# Altium PCB VF_pcb.PcbDoc
Units mil, origin at the board's own origin, x right, y up, seen from the top; angles counter-clockwise.
Board outline 1830 x 1880 mil, 2 copper layers (Top Layer, Bottom Layer); 31 components, 38 nets, 158 pads, 38 vias.
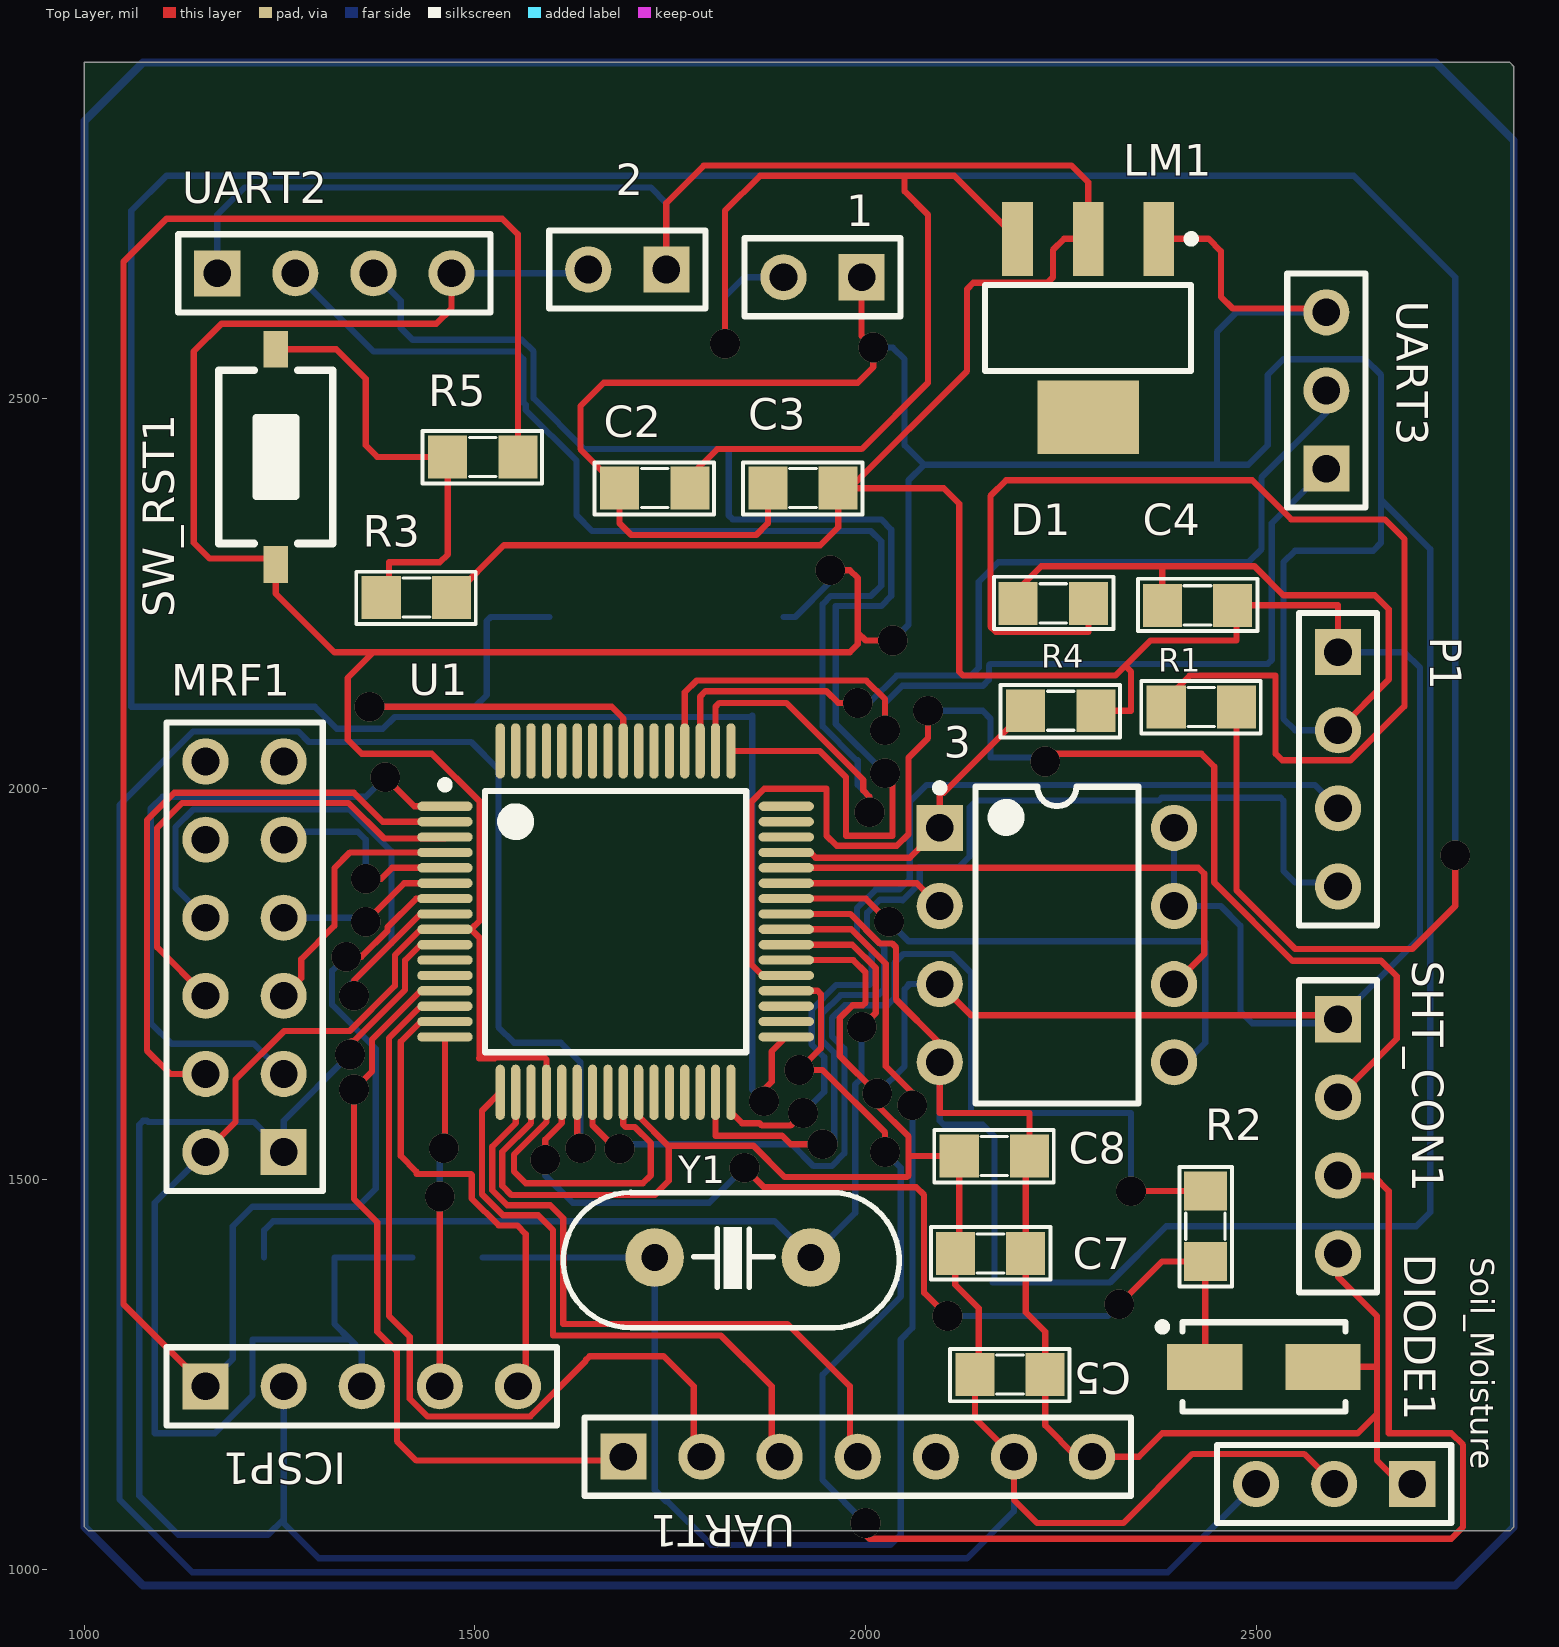
[diagram p0: Top Layer view]
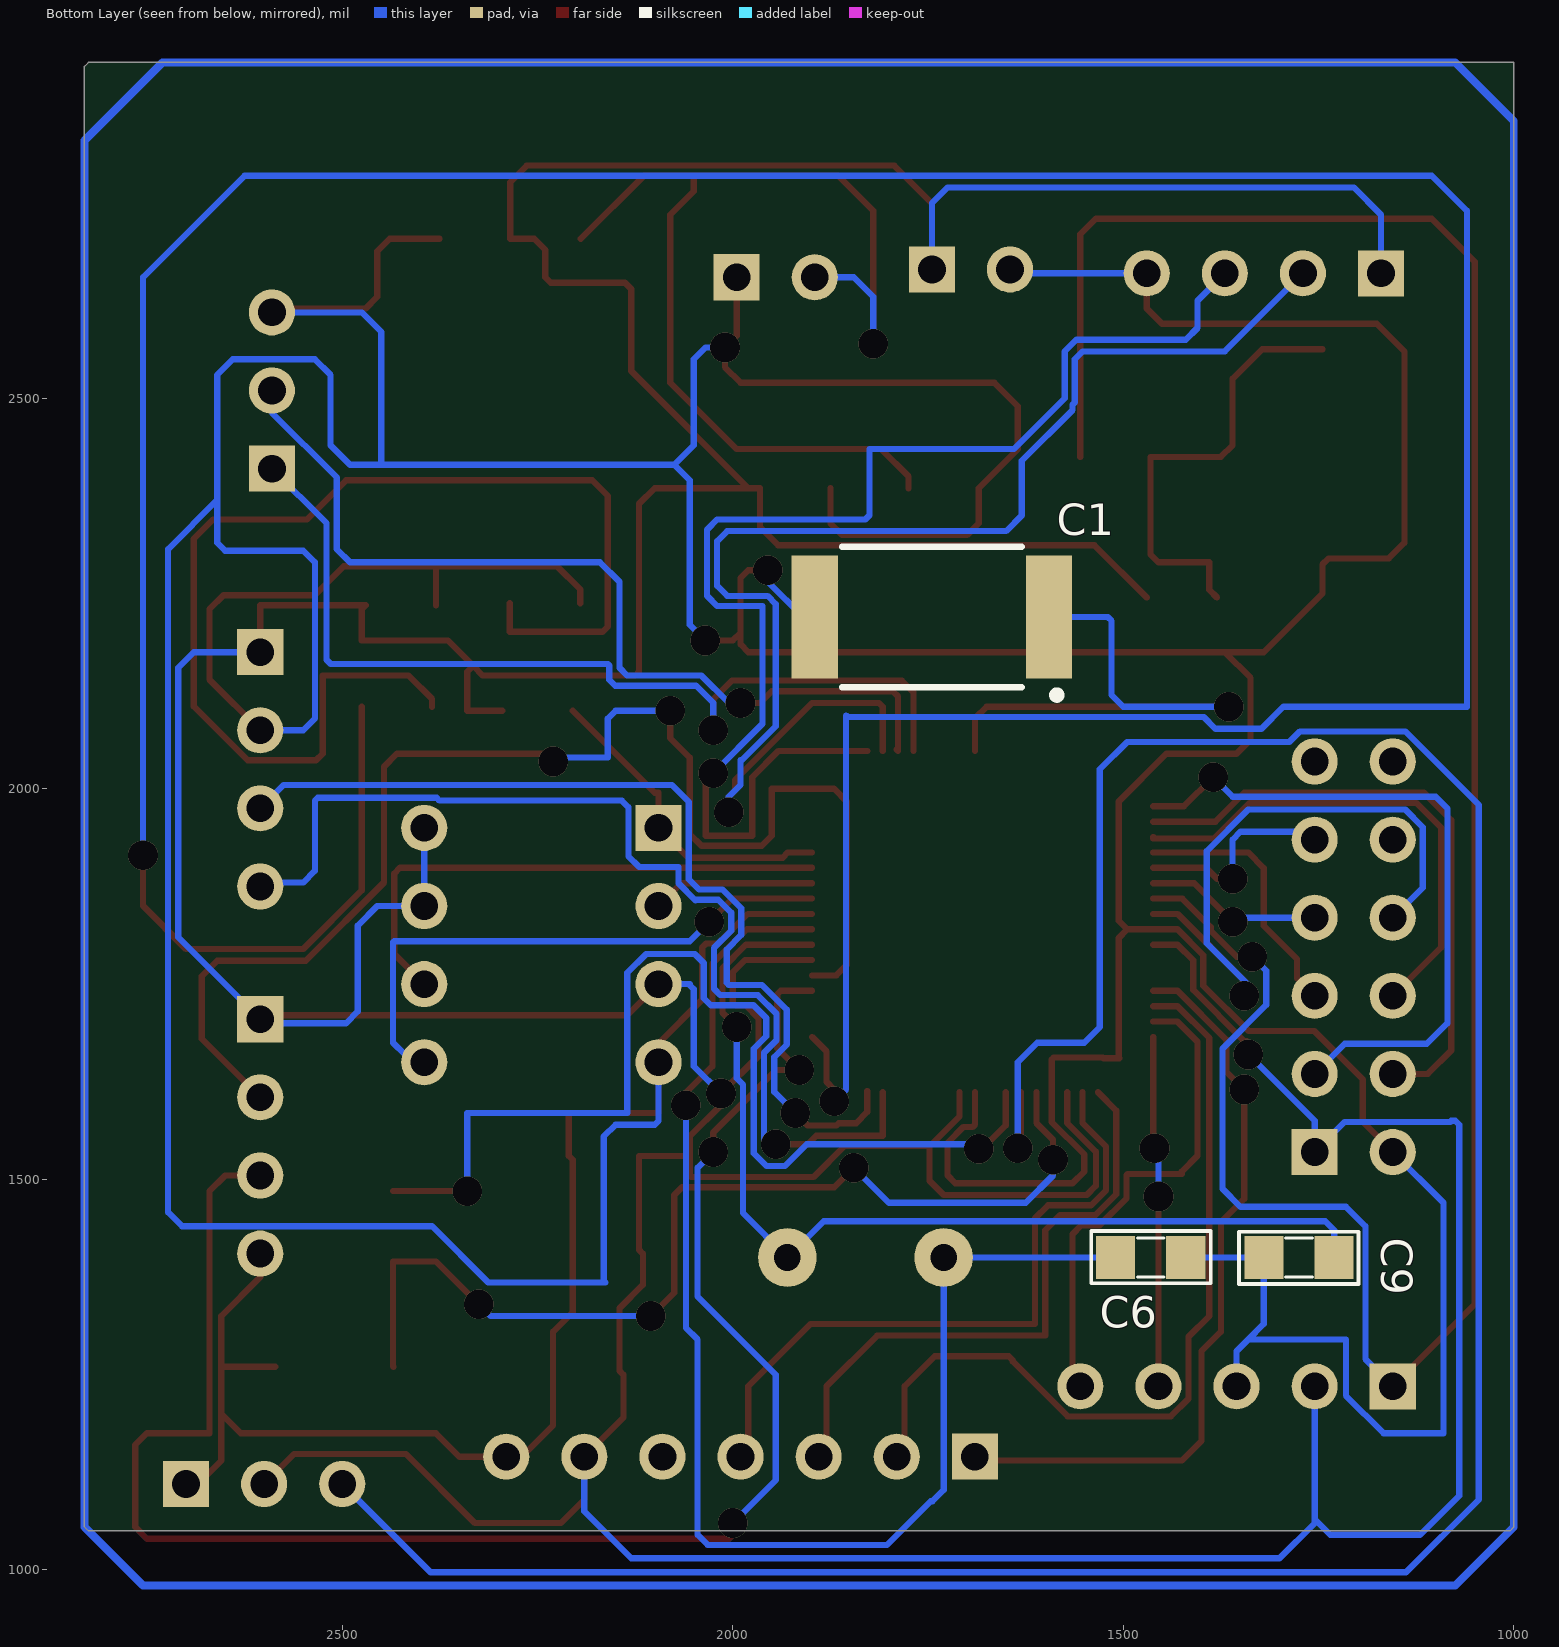
[diagram p1: Bottom Layer view, seen from below]
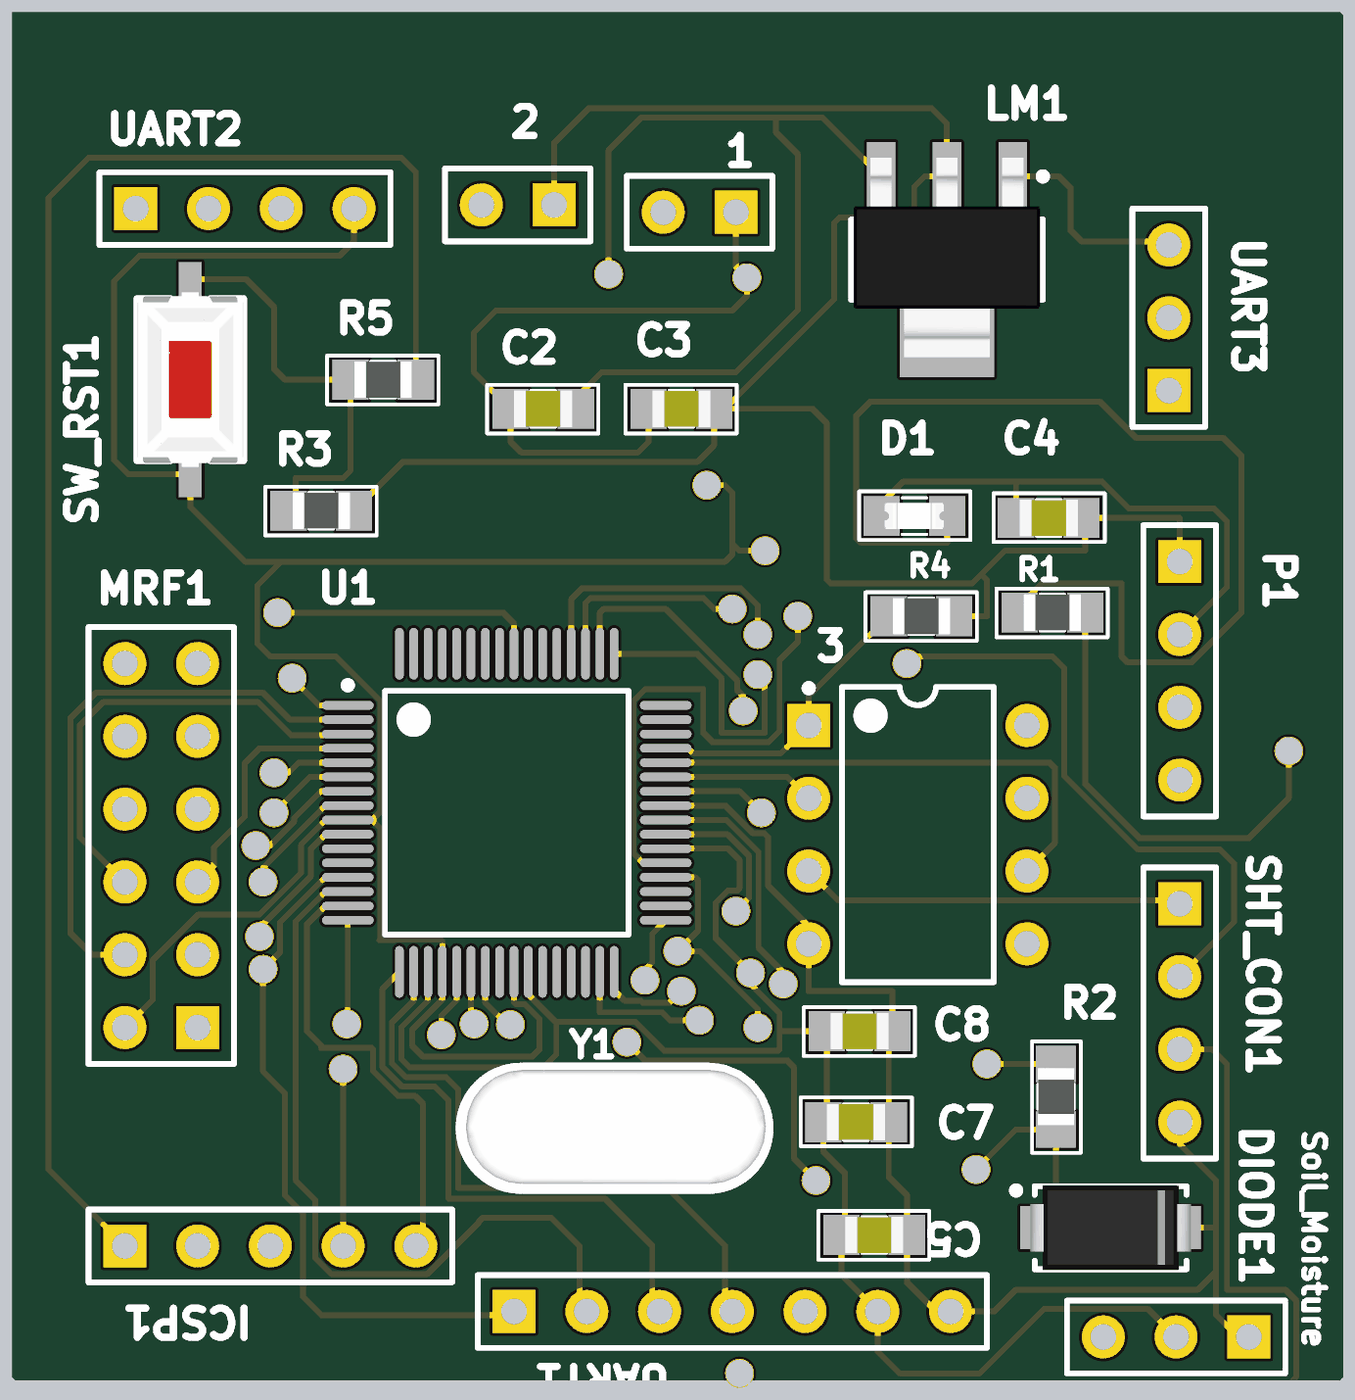
[diagram p2: 3D render of the assembled board from above, using the file's embedded part models]
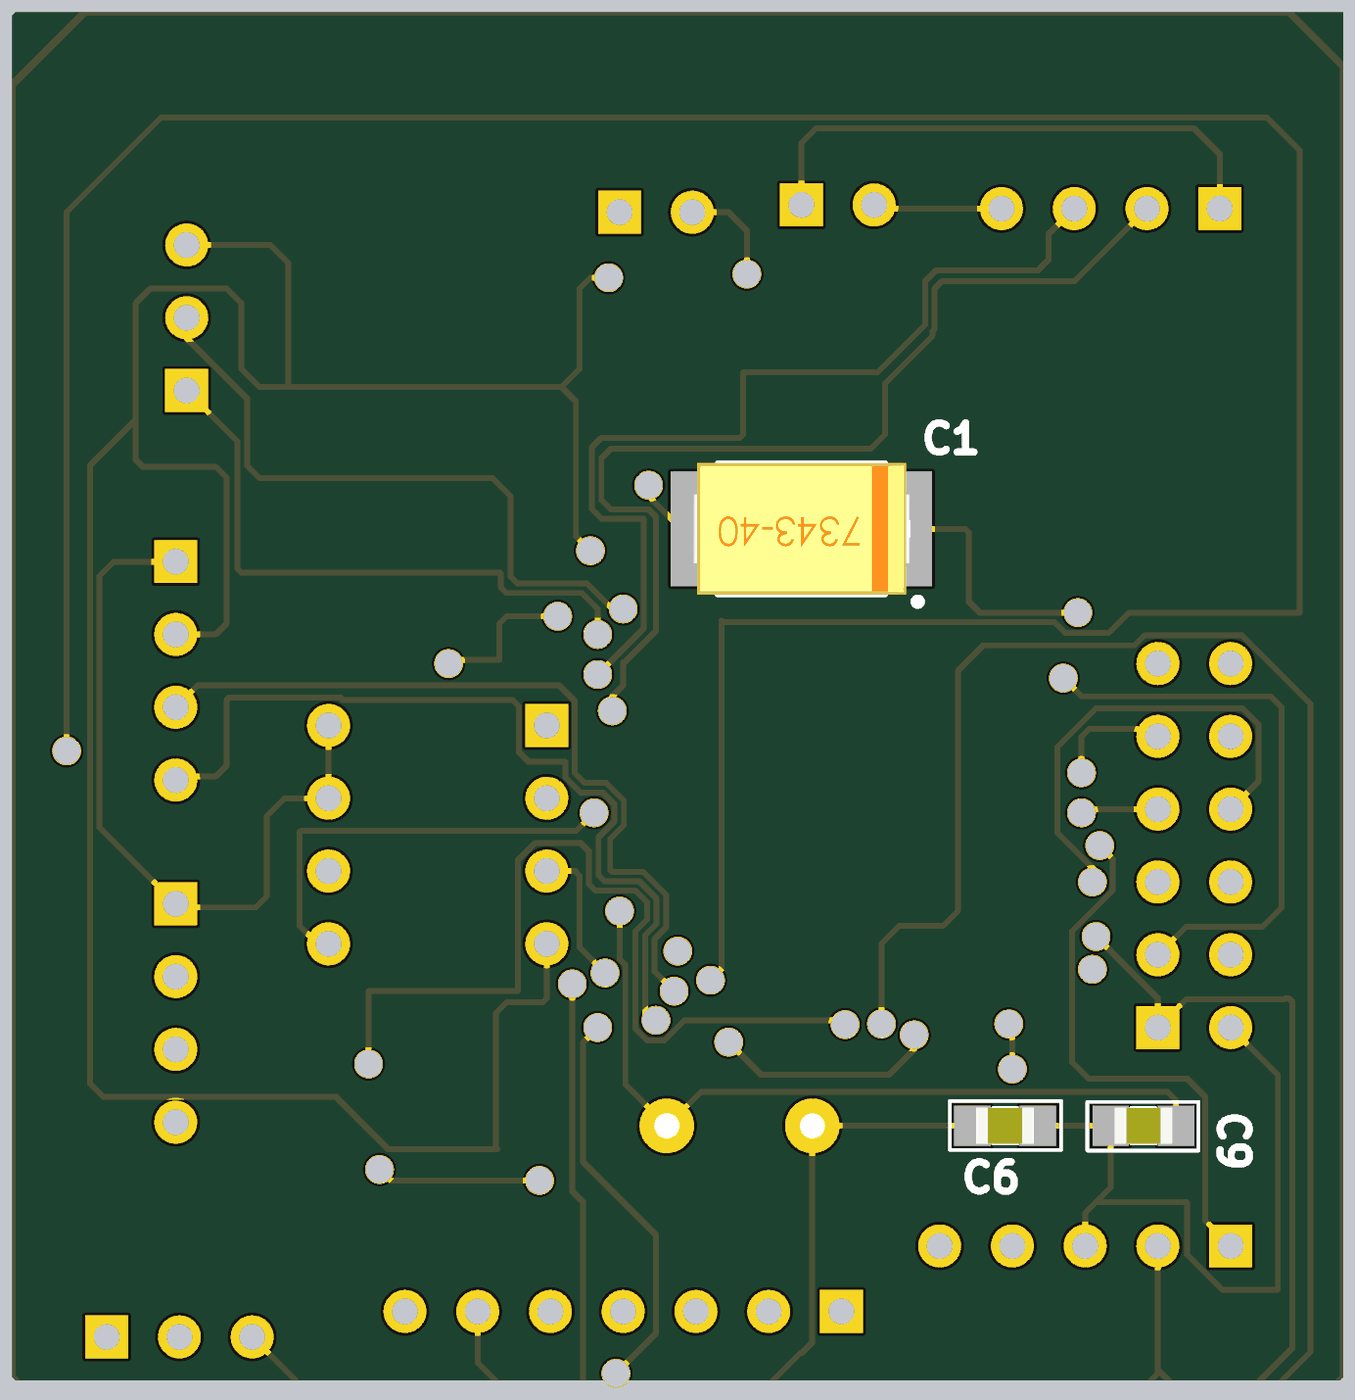
[diagram p3: 3D render of the assembled board from below, using the file's embedded part models]

## Layer stack, top to bottom
Top Solder: solder mask 0.4, Solder Resist, Dk 3.5
Top Layer: signal copper 1.4
Dielectric 1: dielectric 12.6, FR-4, Dk 4.8
Bottom Layer: signal copper 1.4
Bottom Solder: solder mask 0.4, Solder Resist, Dk 3.5

## Board outline
1005,1050 1000,1055 1000,2930 2825,2930 2830,2925 2830,1055 2825,1050

## Design rules (kind name [scope] priority, off if disabled: settings)
Clearance [All] p1: gap=5
PolygonConnect [All] p1: connectstyle=Relief reliefconductorwidth=10 reliefentries=4 polygonreliefangle="90 Angle" airgapwidth=10
RoutingVias [All] p1: holewidth=38 width=20 viastyle="Through Hole" minholewidth=38 minwidth=20 maxholewidth=38 maxwidth=20
SolderMaskExpansion [All] p1: expansion=4
Width [All] p1: maxlimit=10 minlimit=8 preferedwidth=10
30 further rules are at their usual default settings.

## Components (designator, comment, footprint, x,y, rotation, side; value= is the part's Value field where it differs from the comment)
1 "Header 2" HDR1X2 1995,2655 r180 top
2 "3.3V DC" HDR1X2 1745,2665 r180 top
3 "25LC256" DIP-8 2245,1800 r0 top
C1 "10uF" "CAP TANTALUM SMD7434" 1740,2220 r0 bottom
C2 "Cap" "0805 CAP" 1730,2385 r0 top
C3 "Cap" "0805 CAP" 1920,2385 r0 top
C4 "Cap" "0805 CAP" 2425,2235 r180 top
C5 "104" "0805 CAP" 2185,1250 r0 top
C6 "Cap" "0805 CAP" 1465,1400 r0 bottom
C7 "Cap" "0805 CAP" 2160,1405 r180 top
C8 "Cap" "0805 CAP" 2165,1530 r0 top
C9 "Cap" "0805 CAP" 1275,1400 r180 bottom
D1 "LED nguon" "LED SMD 0805" 2240,2235 r180 top
DIODE1 "Diode" "DIODE SMA" 2510,1260 r0 top
ICSP1 "ICSP" HDR1X5 1155,1235 r0 top
LM1 "LM317" SOT223 2285,2590 r180 top
MRF1 "Header 6X2" HDR2X6 1255,1535 r90 top
P1 "Light" HDR1X4 2605,2175 r270 top
R1 "Res1" "0805 RESISTOR" 2430,2105 r0 top
R2 "Res1" "0805 RESISTOR" 2435,1440 r90 top
R3 "Res1" "0805 RESISTOR" 1425,2245 r0 top
R4 "Res Semi" "0805 RESISTOR" 2250,2100 r0 top
R5 "res" "0805 RESISTOR" 1510,2425 r0 top
SHT_CON1 "SHT_Con" HDR1X4 2605,1705 r270 top
Soil_Moisture "" HDR1X3 2700,1110 r180 top
SW_RST1 "SW" "SW 2 PIN SMD" 1245,2425 r90 top
U1 "PIC24FJ128GA306" TQFP-PT64_N 1680,1830 r0 top
UART1 "LORA_TRANCEIVER" HDR1X7 1690,1145 r0 top
UART2 "UART2" HDR1X4 1170,2660 r0 top
UART3 "" HDR1X3 2590,2410 r90 top
Y1 "XTAL" XT2 1830,1400 r180 top

## Footprints (in the part's own frame and the unit in brackets; to place one, negate y for a bottom-side part, rotate by r counter-clockwise, add the part's x,y. Pads: shape width x height; smd on the part's side, far side on the other; paste and mask are expansions set on the pad)
"0805 CAP" [mil] "Compoment SMD 80x50mil"
  rect 50x55 smd: 1(-45,0) 2(45,0)
  silkscreen extent -77,-34 76,33, body extent -40,-25 40,25, height 24
"0805 RESISTOR" [mil] "Compoment SMD 80x50mil"
  rect 50x55 smd: 1(-45,0) 2(45,0)
  silkscreen extent -77,-34 76,33, body extent -39,-25 39,25, height 24
"CAP TANTALUM SMD7434" [mm] "227C-220uF 16V"
  rect 1.5x4 smd: 1(-3.683,0) 2(3.937,0)
  silkscreen extent -4.06,-2.29 3.05,2.66, body extent -3.68,-2.3 3.92,2.3, height 4
"DIODE SMA" [mm]
  rect 2.45x1.5 smd: 1(-1.925,0) 2(1.925,0)
  silkscreen extent -3.42,-1.45 2.65,1.45, body extent -2.8,-1.48 2.8,1.47, height 2.7
DIP-8 [mm] "DIP; 8 Leads; Row Spacing 7.62 mm; Pitch 2.54 mm"
  rect 1.5x1.5 hole 0.9: 1(-3.81,3.81)
  round 1.5 hole 0.9: 2(-3.81,1.27) 3(-3.81,-1.27) 4(-3.81,-3.81) 5(3.81,-3.81) 6(3.81,-1.27) 7(3.81,1.27) 8(3.81,3.81)
  silkscreen extent -3.93,-5.15 2.65,5.23, body extent -3.6,-5.15 3.6,5.15, height 5.08
HDR1X2 [mm] "Connector; Header; 2 Position"
  rect 1.5x1.5 hole 0.9: 1(0,0)
  round 1.5 hole 0.9: 2(2.54,0)
  silkscreen extent -1.27,-1.27 3.81,1.27, body extent -1.27,-1.27 3.81,1.27, height 7
HDR1X3 [mm] "Connector; Header; 3 Position"
  rect 1.5x1.5 hole 0.9: 1(0,0)
  round 1.5 hole 0.9: 2(2.54,0) 3(5.08,0)
  silkscreen extent -1.27,-1.27 6.35,1.27, body extent -1.27,-1.27 6.35,1.27, height 7
HDR1X4 [mm] "Connector; Header; 4 Position"
  rect 1.5x1.5 hole 0.9: 1(0,0)
  round 1.5 hole 0.9: 2(2.54,0) 3(5.08,0) 4(7.62,0)
  silkscreen extent -1.27,-1.27 8.89,1.27
HDR1X5 [mm] "Connector; Header; 5 Position"
  rect 1.5x1.5 hole 0.9: 1(0,0)
  round 1.5 hole 0.9: 2(2.54,0) 3(5.08,0) 4(7.62,0) 5(10.16,0)
  silkscreen extent -1.27,-1.27 11.43,1.27, body extent -1.27,-1.27 11.43,1.27, height 7
HDR1X7 [mm] "Connector; Header; 7 Position"
  rect 1.5x1.5 hole 0.9: 1(0,0)
  round 1.5 hole 0.9: 2(2.54,0) 3(5.08,0) 4(7.62,0) 5(10.16,0) 6(12.7,0) 7(15.24,0)
  silkscreen extent -1.27,-1.27 16.51,1.27, body extent -1.27,-1.27 16.51,1.27, height 7
HDR2X6 [mm] "Connector; Header; 6x2 Position"
  rect 1.5x1.5 hole 0.9: 1(0,0)
  round 1.5 hole 0.9: 2(0,2.54) 3(2.54,0) 4(2.54,2.54) 5(5.08,0) 6(5.08,2.54) 7(7.62,0) 8(7.62,2.54) 9(10.16,0) 10(10.16,2.54) 11(12.7,0) 12(12.7,2.54)
  silkscreen extent -1.27,-1.27 13.97,3.81, body extent -1.27,-1.27 13.97,3.81, height 7
"LED SMD 0805" [mil] "Compoment SMD 80x50mil"
  rect 50x55 smd: 1(-45.39,-2.58) 2(44.61,-2.58)
  silkscreen extent -77,-37 76,30, body extent -41,-21 41,15, height 33
SOT223 [mm]
  rect 1x2.4 smd: 1(-2.3,-2.9) 2(0,-2.9) 3(2.3,-2.9)
  rect 3.3x2.4 smd: 4(0,2.9)
  silkscreen extent -3.48,-3.02 3.35,1.4, body extent -3.25,-3.56 3.25,3.4, height 1.68
"SW 2 PIN SMD" [mm] "Switch SMD type"
  rect 1.2x0.8 smd: 1(-3.5,0) 2(3.5,0)
  silkscreen extent -2.82,-1.85 2.82,1.85, body extent -3.05,-1.85 3.05,1.85, height 2.5
TQFP-PT64_N [mm] "Thin QFP, 64-Leads, Body 10x10mm, Pitch 0.5mm, IPC Medium Density"
  oval 1.8x0.3 smd: 1(-5.55,3.75) 2(-5.55,3.25) 3(-5.55,2.75) 4(-5.55,2.25) 5(-5.55,1.75) 6(-5.55,1.25) 7(-5.55,0.75) 8(-5.55,0.25) 9(-5.55,-0.25) 10(-5.55,-0.75) 11(-5.55,-1.25) 12(-5.55,-1.75) 13(-5.55,-2.25) 14(-5.55,-2.75) 15(-5.55,-3.25) 16(-5.55,-3.75) 33(5.55,-3.75) 34(5.55,-3.25) 35(5.55,-2.75) 36(5.55,-2.25) 37(5.55,-1.75) 38(5.55,-1.25) 39(5.55,-0.75) 40(5.55,-0.25) 41(5.55,0.25) 42(5.55,0.75) 43(5.55,1.25) 44(5.55,1.75) 45(5.55,2.25) 46(5.55,2.75) 47(5.55,3.25) 48(5.55,3.75)
  oval 0.3x1.8 smd: 17(-3.75,-5.55) 18(-3.25,-5.55) 19(-2.75,-5.55) 20(-2.25,-5.55) 21(-1.75,-5.55) 22(-1.25,-5.55) 23(-0.75,-5.55) 24(-0.25,-5.55) 25(0.25,-5.55) 26(0.75,-5.55) 27(1.25,-5.55) 28(1.75,-5.55) 29(2.25,-5.55) 30(2.75,-5.55) 31(3.25,-5.55) 32(3.75,-5.55) 49(3.75,5.55) 50(3.25,5.55) 51(2.75,5.55) 52(2.25,5.55) 53(1.75,5.55) 54(1.25,5.55) 55(0.75,5.55) 56(0.25,5.55) 57(-0.25,5.55) 58(-0.75,5.55) 59(-1.25,5.55) 60(-1.75,5.55) 61(-2.25,5.55) 62(-2.75,5.55) 63(-3.25,5.55) 64(-3.75,5.55)
  silkscreen extent -5.67,-4.25 4.25,4.57, body extent -5,-5 5,5, height 1.2
XT2 [mil] "Footpin for Crystal 2 pin"
  round 75 hole 34: 1(-100,0) 2(100,0)
  silkscreen extent -213,-83 217,90, body extent -216,-87 216,90, height 144

## Part data
1: "Header, 2-Pin"
2: library part "Header 2", "Header, 2-Pin"
C1: library part CAPACITOR
C2 C3 C4 C6 C7 C8 C9: "Capacitor"
C5: library part Cap, "Capacitor"
D1: library part LED0, "Typical INFRARED GaAs LED"
DIODE1: "Default Diode"
ICSP1: library part "Header 5", "Header, 5-Pin"
LM1: "Adj Voltage +1.2 -> +37V"
MRF1: "Header, 6-Pin, Dual row"
P1 SHT_CON1: library part "Header 4", "Header, 4-Pin"
R1 R2 R3: "Resistor"
R4: "Semiconductor Resistor"
R5: library part Res1, "Resistor"
Soil_Moisture: library part "Header 3H"
SW_RST1: library part SW2, "Switch button 2 pin"
UART1: library part Con7, "Connector 7"
UART2: library part Con4, "Connector 4"
UART3: library part Con3, "Connector 3"
Y1: "Crystal Oscillator"

## Via types
v1: diameter 38, hole 38, Top Layer to Bottom Layer, 38 vias

## Nets (pads, with @x,y where several pads share a name; then routed paths per layer and width w, separated by ;. In a path a pad name is that pad's centre, name@x,y a point inside that pad or via, vN(x,y) a via of type N, cw(c..) or ccw(c..) an arc to the next point about the centre after c; other vN are vias at no path point)
3.3VDC: 2.1 3.3 3.7 3.8 C3.2 C4.1 C5.1 C7.2 C8.1 ICSP1.2 LM1.2 MRF1.1 P1.1 R3.2 R4.2 SHT_CON1.1 Soil_Moisture.2 U1.10 U1.19 U1.26 U1.38 UART1.6 UART2.1 | length 10214.6
  Top Layer w8: v1(1340,1660) 1340,1675 1342,1677 1344.98,1677 1410.5,1742.52 1410.5,1780.4 1430.57,1800.47 U1.10 ; R3.2 1537,2312 1942,2312 1965,2335 C3.2 C3.2@1980,2385 ; U1.19 1571.73,1572.03 1535,1535.3 1535,1491.62 1546.62,1480 1730,1480 1748.1,1498.1 1748.1,1542 ; U1.26 1709.53,1580.57 1747.1,1543 1856.6,1543 1896.6,1503 2053,1503 2055,1505 2055,1555 2015,1595 v1(2015,1610) 1967,1658 1967,1706.6 1983.4,1723 1996.6,1723 2000,1726.4 2000,1765.25 1984.46,1780.79 U1.38 ; 2.1 1745,2750 1793,2798 2263.76,2798 2285,2776.76 LM1.2 2254.17,2704.17 2240,2690 2240,2655 2232.93,2647.93 2137.93,2647.93 2130,2640 2130,2535 C3.2@1980,2385 ; 2055,1530 C8.1 2120,1410 C7.2 2115,1365 2145,1335 2145,1255 C5.1 2140,1195 UART1.6 2190,1090 2220,1060 2330,1060 2418.53,1148.53 2561.47,1148.53 Soil_Moisture.2 ; 3.3 2135,1710 2600,1710 SHT_CON1.1 ; R4.2 2340,2100 2340,2150 2332.5,2157.5 ; P1.1 2605,2235 C4.1 2475,2230 2475,2190 2365,2190 2332.5,2157.5 ; C3.2@1980,2385 2100,2385 2120,2365 2120,2150 2125,2145 2320,2145 2332.5,2157.5
  Bottom Layer w8: UART2.1@1165,2650 1170,2655 UART2.1 1170,2735 1205,2770 1725,2770 1745,2750 2.1 ; ICSP1.2 1255,1065 ; v1(1340,1660) 1255,1575 MRF1.1 1216.47,1573.53 1081.47,1573.53 1080,1575 1075,1575 1070,1570 1070,1095 1120,1045 1235,1045 1255,1065 ; v1(2015,1610) 2050,1645 2050,1743.6 2055.7,1749.3 2055,1750 3.3 ; UART1.6 2190,1075 2130,1015 1300,1015 1255,1060 1255,1065 ; 3.8 3.7 2455,1850 2480,1825 2480,1715 2495,1700 2600,1700 SHT_CON1.1 2710,1810 2710,2155 2690,2175 P1.1
5VDC: 1.2 C2.2 LM1.3 | length 1389.1
  Top Layer w8: C2.2 1775,2400 1810,2435 1995,2435 2080,2520 2080,2735 2050,2765 2050,2785 ; v1(1820,2570) 1820,2740 1865,2785 2050,2785 ; LM1.3 2113.62,2785 2050,2785
  Bottom Layer w8: v1(1820,2570) 1820,2630 1845,2655 1.2
AN8: DIODE1.1 R2.1 U1.21 | length 1316.7
  Top Layer w8: v1@1585,1530 v1(1590,1525) 1590,1550.93 1611.1,1572.03 U1.21 ; v1(1845,1515) 1870,1490 2065,1490 2075,1480 2075,1355 v1(2105,1325) ; v1(2325,1340) 2380,1395 R2.1 2435,1260.79 DIODE1.1
  Bottom Layer w8: v1(1590,1525) 1590,1505 1625,1470 1800,1470 v1(1845,1515) ; v1(2105,1325) 2310,1325 v1(2325,1340)
AN9: Soil_Moisture.3 U1.22 | length 3610.7
  Top Layer w8: U1.22 1630.79,1544.21 v1(1635,1540)
  Bottom Layer w8: v1(1635,1540) 1635,1650 1610,1675 1550,1675 1530,1695 1530,2025 1495,2060 1287.24,2060 1273.72,2073.53 1139.04,2073.53 1045,1979.49 1045,1090 1138,997 2387,997 Soil_Moisture.3
CS1: MRF1.6 U1.3 | length 643.1
  Top Layer w8: MRF1.6 1093,1797 1093,1950 1125,1982 1338,1982 1383.5,1936.5 1461.5,1936.5 U1.3
CS2: 3.1 R4.1 U1.45 | length 413.5
  Top Layer w8: U1.45 1929.43,1918.58 1936.11,1911.9 2056.9,1911.9 3.1 2095,1995 2100,1995 R4.1
GND: 1.1 2.2 3.4 C1.2 C2.1 C3.1 C4.2 C5.2 C6.1 C7.1 C8.2 C9.1 D1.2 DIODE1.2 ICSP1.3 LM1.1 MRF1.2 P1.2 SHT_CON1.4 Soil_Moisture.1 SW_RST1.1 U1.9 U1.20 U1.25 U1.41 UART1.7 UART2.4 UART3.3 | length 12507.4
  Top Layer w8: MRF1.2 1193.53,1573.53 1193.53,1628.01 1255.51,1690 1339.6,1690 1397.5,1747.9 1397.5,1787.08 1430.57,1820.16 U1.9 U1.9@1494.84,1820.16 ; UART2.4 1470,2615 1450.42,2595.42 1175.42,2595.42 1140,2560 1140,2315 1160,2295 1237.2,2295 SW_RST1.1 1245,2250 1320,2175 1370,2175 ; U1.25 1689.84,1570.16 1692.94,1567.06 1704.65,1567.06 1725,1546.72 1725,1505 1715,1495 1565,1495 1550,1510 1550,1531.92 1591.42,1573.33 U1.20 1591.42,1653.58 1589.07,1655.93 1526.19,1655.93 1525.26,1655 1505,1655 1505.93,1655.93 1505.93,1809.07 U1.9@1494.84,1820.16 ; C3.1 1875,2340 1860,2325 1700,2325 1685,2340 C2.1 1635,2435 1635,2490 1665,2520 1990,2520 2010,2540 v1(2010,2565) 1995,2580 1.1 ; U1.41 1980.56,1839.84 2018.4,1802 2033.94,1802 2039,1796.94 2039,1730.27 2095,1674.27 3.4 2095,1585 2210,1585 C8.2 2205,1525 C7.1 2205,1330 2230,1305 C5.2 2230,1185 2270,1145 UART1.7 2350,1145 2380,1175 2630,1175 2655,1200 ; v1(1955,2280) 1980,2280 1990,2270 1990,2200 ; v1(2035,2190) 2000,2190 1990,2200 ; D1.2 2195.39,2255.39 2225,2285 2380,2285 ; LM1.1 2439.17,2704.17 2455,2688.35 2455,2630 2470,2615 2585,2615 UART3.3 ; C4.2 2380,2285 ; DIODE1.2 2655,1260 ; SHT_CON1.4 2605,1375 2655,1325 2655,1260 ; P1.2 2670,2140 2670,2230 2652,2248 2535,2248 2498,2285 2380,2285 ; Soil_Moisture.1 2685,1110 2655,1140 2655,1200 ; 1370,2175 1980,2175 1990,2185 1990,2200 ; 1370,2175 1337,2142 1337,2063 1355,2045 1444.74,2045 1505.93,1983.81 1505.93,1831.24 U1.9@1494.84,1820.16 ; 2655,1200 2655,1260
  Bottom Layer w8: MRF1.2 1090,1470 1090,1175 1166.78,1175 1215,1223.22 1215,1295 1340,1295 ; ICSP1.3 1355,1280 1340,1295 ; C6.1 C9.1 1320,1315 1340,1295 ; UART2.4 1640,2660 2.2 ; C1.2 1910,2220 1955,2265 v1(1955,2280) ; v1(2010,2565) 2035,2565 2050,2550 2050,2440 2075,2415 ; v1(2035,2190) 2055,2210 2055,2395 2075,2415 ; 3.4 2095,1575 2100,1570 2150,1570 2165,1555 2165,1370 2163,1368 2313,1368 2385,1440 2705,1440 2723,1458 2723,2307 2660,2370 ; UART3.3 2475,2610 2450,2585 2450,2415 ; P1.2 2550,2075 2535,2090 2535,2290 2550,2305 2650,2305 2660,2315 2660,2370 ; 2075,2415 2450,2415 ; 2450,2415 2490,2415 2515,2440 2515,2530 2535,2550 2640,2550 2660,2530 2660,2370
INT1_RP21: MRF1.5 U1.4 | length 340.3
  Top Layer w8: MRF1.5 1277.5,1757.5 1277.5,1782.1 1320,1824.6 1320,1898.58 1340,1918.58 U1.4
LED1: R1.2 U1.33 | length 5184.4
  Top Layer w8: v1(1870,1600) 1870,1615 1880,1625 1880,1663.86 U1.33 ; R1.2 2475,1870 2550,1795 2700,1795 2755,1850 v1(2755,1915)
  Bottom Layer w8: v1(1870,1600) 1855,1615 1855,2094 1853,2092 1397,2092 1382,2077 1323,2077 1295,2105 1060,2105 1060,2740 1105,2785 2625,2785 2755,2655 v1(2755,1915)
NetC1_1: C1.1 U1.56 | length 705.9
  Top Layer w8: v1(1365,2105) 1675,2105 1689.84,2090.16 U1.56
  Bottom Layer w8: v1(1365,2105) 1500,2105 1515,2120 1515,2215 1520,2220 C1.1
NetD1_1: D1.1 R1.1 | length 1575.3
  Top Layer w8: D1.1 2285.39,2201.08 2166.67,2201.08 2160,2207.74 2160,2375 2180,2395 2495,2395 2545,2345 2665,2345 2690,2320 2690,2105.51 2620.96,2036.47 2533.53,2036.47 2525,2045 2525,2145 2415,2145 2385,2115 R1.1
NetR3_1: R3.1 R5.1 SW_RST1.2 | length 580.2
  Top Layer w8: SW_RST1.2 1322.2,2562.8 1360,2525 1360,2440 1375,2425 R5.1 1465,2300 1455,2290 1390,2290 1390,2255 R3.1
OSCI: C9.2 U1.39 Y1.1 | length 1290.9
  Top Layer w8: U1.39 1983.16,1800.47 2013,1770.63 2013,1713 v1(1995,1695)
  Bottom Layer w8: C9.2 1230,1435 1241.5,1446.5 1883.5,1446.5 Y1.1 1987,1457 1987,1621.6 1995,1629.6 v1(1995,1695)
OSCO: C6.2 U1.40 Y1.2 | length 1764.2
  Top Layer w8: U1.40 1981.86,1820.16 2026,1776.02 2026,1645 2060,1611 v1(2060,1595)
  Bottom Layer w8: C6.2 Y1.2 1730,1102.38 1744.38,1088 1746.38,1088 1802.38,1032 2032,1032 2045,1045 2045,1295 2060,1310 v1(2060,1595)
PGC: ICSP1.5 U1.15 | length 633.5
  Top Layer w8: U1.15 1430.57,1702.05 1405,1676.47 1405,1530 1425,1510 1425,1507 1494.46,1507 1496,1505.46 1496,1475.46 1530.46,1441 1554,1441 1565,1430 1565,1245 ICSP1.5
PGD: ICSP1.4 U1.16 | length 449.4
  Top Layer w8: ICSP1.4 v1(1455,1478) ; v1@1461.5,1540 U1.16
  Bottom Layer w8: v1(1455,1478) 1455,1535 v1(1460,1540)
RB2: U1.14 UART1.2 | length 1077
  Top Layer w8: U1.14 1430.57,1721.73 1390,1681.16 1390,1325 1416.47,1298.53 1416.47,1219.04 1439.04,1196.47 1570.96,1196.47 1641.47,1266.99 1641.47,1268.26 1646.74,1273.53 1741.47,1273.53 1780,1235 1780,1155 UART1.2
RB3: U1.13 UART1.1 | length 968
  Top Layer w8: U1.13 1430.57,1741.42 1368,1678.84 1368,1638 v1(1345,1615) 1345,1475 1375,1445 1375,1305 1400,1280 1400,1165 1425,1140 1685,1140 UART1.1
RB10: R2.2 U1.23 | length 1406.7
  Top Layer w8: U1.23 1650.47,1569.13 1680.53,1539.06 v1(1685,1539.06) v1@1685,1540 ; v1(2340,1485) R2.2
  Bottom Layer w8: v1(1685,1539.06) 1690.94,1545 1905.4,1545 1933.4,1517 1956.6,1517 1973,1533.4 1973,1667.4 1957,1683.4 1957,1706.6 1973.4,1723 2028,1723 2037,1732 2037,1777 2048.53,1788.53 2110.96,1788.53 2135,1764.49 2135,1585 2340,1585 v1(2340,1485)
RSTMRF: MRF1.3 U1.1 | length 880.5
  Top Layer w8: v1(1385,2015) 1422.36,1977.64 U1.1
  Bottom Layer w8: MRF1.3 1216.47,1673.53 1111.47,1673.53 1085,1700 1085,1975 1100,1990 1360,1990 v1(1385,2015)
SCK1_RP26: MRF1.9 U1.5 | length 270.5
  Top Layer w8: v1(1360,1885) 1380,1885 1393.9,1898.9 U1.5
  Bottom Layer w8: MRF1.9 1265,1945 1350,1945 1360,1935 v1(1360,1885)
SCK2_RP3: 3.6 U1.44 | length 695.5
  Top Layer w8: U1.44 2426.1,1898.9 2433.53,1891.47 2433.53,1788.53 3.6
SCL1: SHT_CON1.2 U1.37 | length 1758.2
  Top Layer w8: U1.37 1867.58,1761.1 1854.07,1774.61 1854.07,1983.81 1870.26,2000 1950,2000 1950,1940 1963,1927 2039.98,1927 2055,1942.02 2055,2040 2080,2065 v1(2080,2100) ; v1(2230,2035) 2240,2045 2430,2045 2446.53,2028.47 2446.53,1880.09 2546.62,1780 2660,1780 2680,1760 2680,1680 SHT_CON1.2
  Bottom Layer w8: v1(2080,2100) 2150,2100 2160,2090 2160,2040 2225,2040 v1(2230,2035)
SCL2: P1.3 U1.32 | length 1228.9
  Top Layer w8: U1.32@1827.64,1613 U1.32 1827.64,1586.36 1842,1572 1864.37,1572 1867.37,1569 1904,1569 v1(1920,1585)
  Bottom Layer w8: v1(1920,1585) 1947,1612 1947,1656.63 1931,1672.63 1931,1717.37 1962.63,1749 2005,1749 2007.83,1751.83 2007.83,1794.19 1989,1813.02 1989,1846.98 2013.02,1871 2043.13,1871 2056.47,1884.34 2056.47,1983.26 2078.22,2005 2575,2005 P1.3
SDA1: SHT_CON1.3 U1.36 | length 2248.3
  Top Layer w8: U1.36 1938.58,1741.42 1942.94,1737.06 1942.94,1667.94 v1(1915,1640) 1945,1640 2025,1560 v1(2025,1535) ; v1(2000,1060) 2000,1045 2005,1040 2750,1040 2765,1055 2765,1160 2750,1175 2670,1175 2670,1485 2650,1505 SHT_CON1.3
  Bottom Layer w8: v1(2000,1060) 1945,1115 1945,1250 2045,1350 2045,1515 v1(2025,1535)
SDA2: P1.4 U1.31 | length 1417.4
  Top Layer w8: U1.31 1807.95,1556 1893.13,1556 1904.13,1545 v1(1945,1545) 1925,1545
  Bottom Layer w8: v1(1945,1545) 1948,1548 1960,1548 1960,1662.02 1944,1678.02 1944,1711.98 1968.02,1736 2016,1736 2024,1744 2024,1796.4 2002,1818.4 2002,1841.6 2018.4,1858 2047,1858 2047.76,1857.24 2069.47,1878.96 2069.47,1900 2120,1900 2133.53,1913.53 2133.53,1976.47 2142.06,1985 2375.51,1985 2379.04,1988.53 2531.47,1988.53 2535,1985 2535,1895 2550,1880 2600,1880 P1.4
SDI1_RP27: MRF1.8 U1.8 | length 824.3
  Top Layer w8: v1(1345,1735) 1345,1754.27 1430.57,1839.84 U1.8
  Bottom Layer w8: MRF1.8 1116.47,1873.53 1116.47,1950.96 1139.04,1973.53 1339.86,1973.53 1393,1920.38 1393,1802.27 1335.37,1744.63 v1(1345,1735)
SDI2_RP4: 3.2 U1.43 | length 208.6
  Top Layer w8: U1.43 2065.79,1879.21 3.2
SDO1_RP19: MRF1.7 U1.6 | length 229
  Top Layer w8: v1(1360,1830) 1409.21,1879.21 U1.6
  Bottom Layer w8: MRF1.7 1355,1835 v1(1360,1830)
SDO2_RP2: 3.5 U1.42 | length 738.6
  Top Layer w8: U1.42 2000.47,1859.53 v1(2030,1830)
  Bottom Layer w8: v1(2030,1830) 2055,1805 2433.53,1805 2435,1803.53 2435,1675 2420,1660 2405,1660 3.5
U1RX_RP22: U1.51 UART3.2 | length 1183.4
  Top Layer w8: U1.51@1790,2050.24 U1.51 1788.27,2118.27 1795,2125 1950,2125 1965,2110 v1(1990,2110)
  Bottom Layer w8: v1(1990,2110) 2005,2110 2040,2145 2135,2145 2145,2155 2145,2265 2170,2290 2490,2290 2507,2307 2507,2398.78 2590,2481.78 UART3.2
U1TX_RP25: U1.52 UART3.1 | length 1224.8
  Top Layer w8: U1.52 1768.58,2123.58 1783.58,2138.58 2001.02,2138.58 2025,2114.6 v1(2025,2075)
  Bottom Layer w8: v1(2025,2075) 2025,2110 2047,2132 2150.38,2132 2158,2139.62 2158,2158 2160,2160 2515,2160 2520,2165 2520,2340 UART3.1
U2RX_RP24: U1.49 UART2.3 | length 1685.6
  Top Layer w8: U1.49 1941.5,2048.5 1975,2015 1975,1940 2034.6,1940 2034.6,2010.4 v1(2025,2020)
  Bottom Layer w8: UART2.3 1405,2625 1405,2590 1420,2575 1560,2575 1575,2560 1575,2500 1640,2435 1825,2435 1825,2350 1830,2345 2020,2345 2033,2332 2033,2247 2020,2234 1962,2234 1962,2083 v1(2025,2020)
U2TX_RP23: U1.50 UART2.2 | length 1736.7
  Top Layer w8: U1.50 1807.95,2105 1812.95,2110 1898.38,2110 1997,2011.38 1997,1998 2005,1990 v1(2005,1970)
  Bottom Layer w8: UART2.2 1370,2560 1552,2560 1562,2550 1562,2494.62 1565,2491.62 1565,2485 1630,2420 1630,2350 1650,2330 2007,2330 2020,2317 2020,2260 2007,2247 1955.38,2247 1945,2236.62 1945,2080 1988.38,2036.62 1990,2036.62 1990,2005 2005,1990 v1(2005,1970)
U3RX_RP7: U1.18 UART1.4 | length 873.1
  Top Layer w8: U1.18 1552.05,1572.05 1522,1542 1522,1486.23 1541.23,1467 1596.23,1467 1613,1450.23 1613,1315 1900,1315 1980,1235 1980,1155 UART1.4
U3TX_RP6: U1.17 UART1.3 | length 786.4
  Top Layer w8: U1.17 1509,1588.13 1509,1480.85 1535.85,1454 1581,1454 1600,1435 1600,1300 1815,1300 1880,1235 1880,1155 UART1.3
VPP: ICSP1.1 R5.2 U1.7 | length 3214.6
  Top Layer w8: ICSP1.1 1050,1340 1050,2675 1105,2730 1535,2730 1555,2710 R5.2 ; v1(1335,1785) 1354.6,1785 1388,1818.4 1388,1823 1424.53,1859.53 U1.7
  Bottom Layer w8: ICSP1.1 1190,1270 1190,1440 1215,1465 1350,1465 1373,1488 1373,1667.4 1317,1723.4 1317,1767 v1(1335,1785)
WAKE: MRF1.4 U1.2 | length 793.8
  Top Layer w8: MRF1.4 1110,1635 1080,1665 1080,1960 1115,1995 1345,1995 1382.05,1957.95 U1.2
pads on no net: LM1.4 MRF1.10 MRF1.11 MRF1.12 U1.11 U1.12 U1.24 U1.27 U1.28 U1.29 U1.30 U1.34 U1.35 U1.46 U1.47 U1.48 U1.53 U1.54 U1.55 U1.57 U1.58 U1.59 U1.60 U1.61 U1.62 U1.63 U1.64 UART1.5
copper on no net: | length 7369.6
  Bottom Layer w10: 1000,1055 1075,980 2655,980 2755,980 2830,1055 2830,2830 2730,2930 1075,2930 1000,2855 1000,2830 1000,1055